# Altium PCB GR_Interface_Emilie.PcbDoc
Units mil, origin at the board's own origin, x right, y up, seen from the top; angles counter-clockwise.
Board outline 3527.56 x 1173.43 mil, 2 copper layers (Top Layer, Bottom Layer); 28 components, 31 nets, 102 pads, 12 vias.
Unrouted connection lines stored in the file: 20.
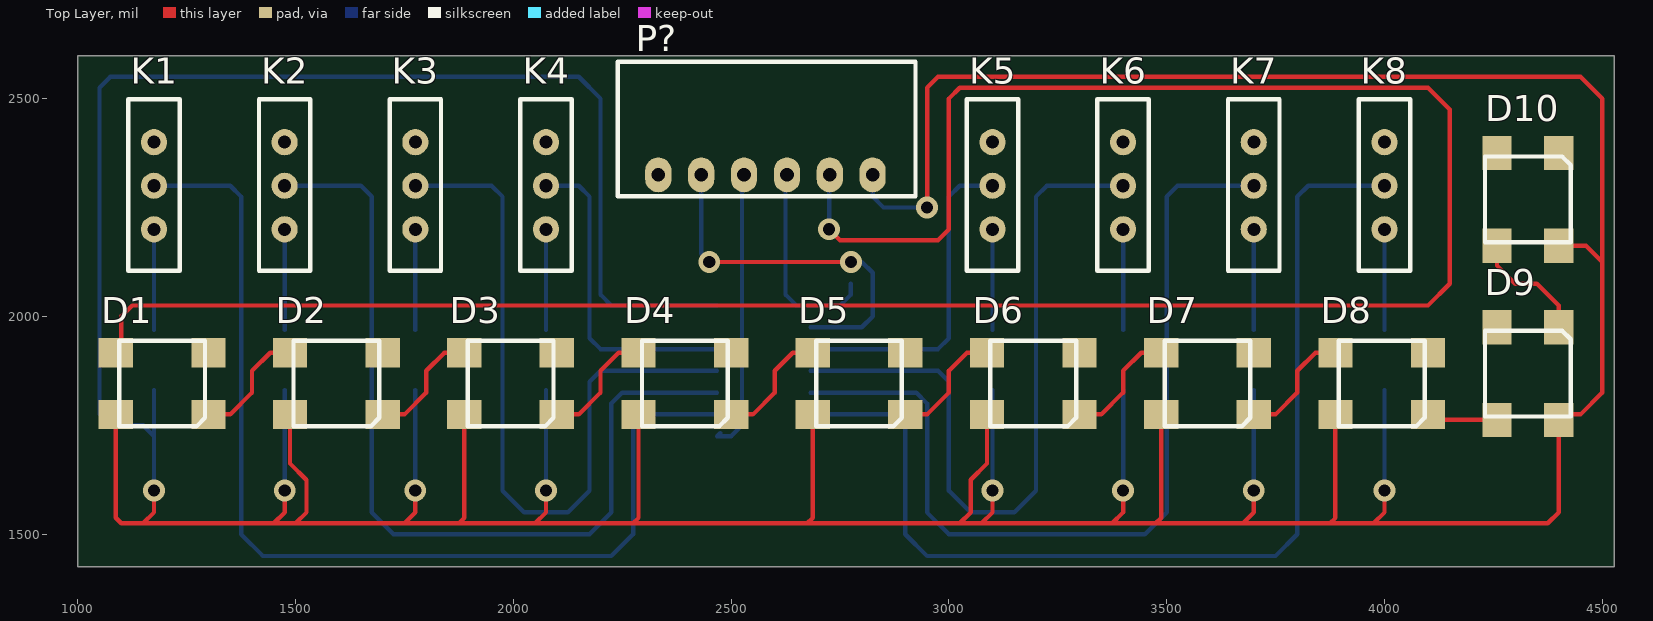
[diagram p0: Top Layer view]
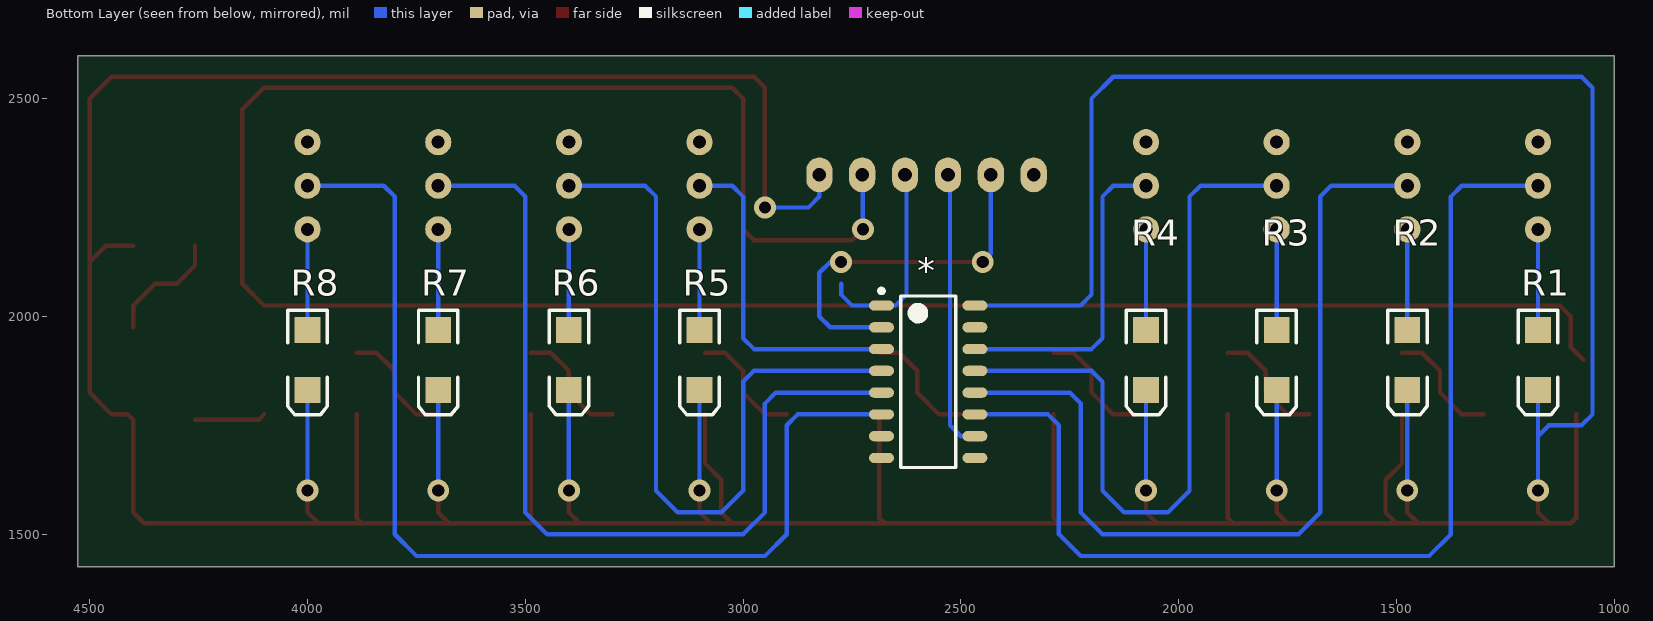
[diagram p1: Bottom Layer view, seen from below]

## Layer stack, top to bottom
Top Solder: solder mask 0.4, Solder Resist, Dk 3.5
Top Layer: signal copper 1.4
Dielectric 1: dielectric 12.6, FR-4, Dk 4.8
Bottom Layer: signal copper 1.4
Bottom Solder: solder mask 0.4, Solder Resist, Dk 3.5

## Board outline
1000,1425 4527.56,1425 4527.56,1811.02 4527.56,2598.43 1000,2598.43

## Design rules (kind name [scope] priority, off if disabled: settings)
Clearance [All] p1: gap=10
PolygonConnect [All] p1: connectstyle=Relief reliefconductorwidth=10 reliefentries=4 polygonreliefangle="90 Angle" airgapwidth=10
RoutingVias [All] p1: holewidth=28 width=50 viastyle="Through Hole" minholewidth=28 minwidth=50 maxholewidth=28 maxwidth=50
SolderMaskExpansion [All] p1: expansion=4
Width [All] p1: maxlimit=10 minlimit=10 preferedwidth=10
30 further rules are at their usual default settings.

## Components (designator, comment, footprint, x,y, rotation, side; value= is the part's Value field where it differs from the comment)
* "74HC165" "16 pins SOIC, TI" 2575,1850 r180 bottom
D1 "NeoPixel" Neopixel 1300,1775 r180 top
D2 "NeoPixel" Neopixel 1700,1775 r180 top
D3 "NeoPixel" Neopixel 2100,1775 r180 top
D4 "NeoPixel" Neopixel 2500,1775 r180 top
D5 "NeoPixel" Neopixel 2900,1775 r180 top
D6 "NeoPixel" Neopixel 3300,1775 r180 top
D7 "NeoPixel" Neopixel 3700,1775 r180 top
D8 "NeoPixel" Neopixel 4100,1775 r180 top
D9 "NeoPixel" Neopixel 4400,1975 r270 top
D10 "NeoPixel" Neopixel 4400,2375 r270 top
K1 "Switch" SWITCH 1175,2400 r270 top
K2 "Switch" SWITCH 1475,2400 r270 top
K3 "Switch" SWITCH 1775,2400 r270 top
K4 "Switch" SWITCH 2075,2400 r270 top
K5 "Switch" SWITCH 3100,2400 r270 top
K6 "Switch" SWITCH 3400,2400 r270 top
K7 "Switch" SWITCH 3700,2400 r270 top
K8 "Switch" SWITCH 4000,2400 r270 top
P? "Header 6H" "MOLEX SPOX 6X1H" 2825,2325 r180 top
R1 "Res2" 3.2X1.6X1.1 1175,1900 r270 bottom
R2 "" 3.2X1.6X1.1 1475,1900 r270 bottom
R3 "Res2" 3.2X1.6X1.1 1775,1900 r270 bottom
R4 "Res2" 3.2X1.6X1.1 2075,1900 r270 bottom
R5 "Res2" 3.2X1.6X1.1 3100,1900 r270 bottom
R6 "Res2" 3.2X1.6X1.1 3400,1900 r270 bottom
R7 "Res2" 3.2X1.6X1.1 3700,1900 r270 bottom
R8 "Res2" 3.2X1.6X1.1 4000,1900 r270 bottom

## Footprints (in the part's own frame and the unit in brackets; to place one, negate y for a bottom-side part, rotate by r counter-clockwise, add the part's x,y. Pads: shape width x height; smd on the part's side, far side on the other; paste and mask are expansions set on the pad)
3.2X1.6X1.1 [mm] "SMT LED; 2 Flat Leads"
  rect 1.5x1.5 smd: 1(-1.75,0) 2(1.75,0)
  silkscreen extent -2.9,-1.15 3.2,1.15
"16 pins SOIC, TI" [mm] "SOIC, 16-Leads, Body 9,90x3,90mm, Pitch 1,27mm, IPC Medium Density"
  oval 1.45x0.6 smd: 1(-2.725,4.445) 2(-2.725,3.175) 3(-2.725,1.905) 4(-2.725,0.635) 5(-2.725,-0.635) 6(-2.725,-1.905) 7(-2.725,-3.175) 8(-2.725,-4.445) 9(2.725,-4.445) 10(2.725,-3.175) 11(2.725,-1.905) 12(2.725,-0.635) 13(2.725,0.635) 14(2.725,1.905) 15(2.725,3.175) 16(2.725,4.445)
  silkscreen extent -2.85,-5 1.6,5.42, body extent -3,-5 3,5, height 1.75
"MOLEX SPOX 6X1H" [mil] "MOLEX SPOX 6X1H, 22-05-7065"
  oval 60x80 hole 31.5: 1(0,0) 2(98.43,0) 3(196.85,0) 4(295.28,0) 5(393.7,0) 6(492.13,0)
  silkscreen extent -98,-260 586,49, body extent -95,-260 590,51, height 193
Neopixel [mm]
  rect 2x1.7 smd: 1(0,0) 2(0,-3.6) 3(5.4,-3.6) 4(5.4,0)
  silkscreen extent 0.2,-4.3 5.2,0.7, body extent 0.19,-4.33 5.19,0.67, height 2
SWITCH [mil] "2 pos switch,  09.03290.01"
  round 60 hole 30: 0(0,0) 1(100,0) 2(200,0)
  silkscreen extent -98,-59 295,59, body extent -98,-59 295,59, height 291

## Part data
*: library part SN74HC165, "8 bits Shift Register"
K1 K2 K3 K4 K5 K6 K7 K8: "3 pos switch, 09.03290.01"
P?: "Header, 6-Pin, Right Angle"
R1 R3 R4 R5 R6 R7 R8: "Resistor"
R2: library part Res2, "Resistor"

## Via types
v1: diameter 50, hole 28, Top Layer to Bottom Layer, 12 vias

## Nets (pads, with @x,y where several pads share a name; then routed paths per layer and width w, separated by ;. In a path a pad name is that pad's centre, name@x,y a point inside that pad or via, vN(x,y) a via of type N, cw(c..) or ccw(c..) an arc to the next point about the centre after c; other vN are vias at no path point)
GND: *.8 *.15 D1.2 D2.2 D3.2 D4.2 D5.2 D6.2 D7.2 D8.2 D9.2 D10.2 K1.0 K2.0 K3.0 K4.0 K5.0 K6.0 K7.0 K8.0 P?.6
Net*_1: *.1 P?.3 | length 470.7
  Bottom Layer w10: P?.3@2625,2325 2625,2050 2650,2025 *.1 2750,2025 2775,2050 2775,2075
Net*_2: *.2 P?.5 | length 846.2
  Top Layer w10: v1(2450,2125) v1(2775,2125)
  Bottom Layer w10: P?.5 2431.3,2143.7 v1(2450,2125) ; *.2 2800,1975 2825,2000 2825,2100 2800,2125 v1(2775,2125)
Net*_3: *.3 K5.1 | length 763.4
  Bottom Layer w10: *.3 2975,1925 3000,1950 3000,2275 3025,2300 K5.1
Net*_4: *.4 K6.1 | length 1704.8
  Bottom Layer w10: *.4 2975,1875 3000,1850 3000,1600 3050,1550 3150,1550 3200,1600 3200,2275 3225,2300 K6.1
Net*_5: *.5 K7.1 | length 2054.8
  Bottom Layer w10: *.5 2925,1825 2950,1800 2950,1550 3000,1500 3450,1500 3500,1550 3500,2275 3525,2300 K7.1
Net*_6: *.6 K8.1 | length 2404.8
  Bottom Layer w10: *.6 2875,1775 2900,1750 2900,1500 2950,1450 3750,1450 3800,1500 3800,2275 3825,2300 K8.1
Net*_10: *.10 P?.4 | length 652.9
  Bottom Layer w10: *.10@2475,1732.28 *.10 2500,1725 2525,1750 P?.4@2525,2325
Net*_11: *.11 K1.1 | length 2379.8
  Bottom Layer w10: K1.1 1350,2300 1375,2275 1375,1500 1425,1450 2225,1450 2275,1500 2275,1750 2300,1775 *.11
Net*_12: *.12 K2.1 | length 2029.8
  Bottom Layer w10: K2.1 1650,2300 1675,2275 1675,1550 1725,1500 2175,1500 2225,1550 2225,1800 2250,1825 *.12
Net*_13: *.13 K3.1 | length 1679.8
  Bottom Layer w10: K3.1 1950,2300 1975,2275 1975,1600 2025,1550 2125,1550 2175,1600 2175,1850 2200,1875 *.13
Net*_14: *.14 K4.1 | length 738.4
  Bottom Layer w10: K4.1 2150,2300 2175,2275 2175,1950 2200,1925 *.14
NetD1_1: D1.1 D2.3 | length 275.4
  Top Layer w10: D1.1 1350,1775 1400,1825 1400,1875 1441.73,1916.73 D2.3
NetD1_3: D1.3 P?.2 | length 5495
  Top Layer w10: D1.3@1070.67,1900 D1.3 1100,1929.33 1100,2000 1125,2025 4100,2025 4150,2075 4150,2475 4100,2525 3025,2525 3000,2500 3000,2200 2975,2175 2750,2175 v1(2725,2200)
  Bottom Layer w10: v1(2725,2200) P?.2@2725,2325
NetD2_1: D2.1 D3.3 | length 275.4
  Top Layer w10: D2.1 1750,1775 1800,1825 1800,1875 1841.73,1916.73 D3.3
NetD3_1: D3.1 D4.3 | length 275.4
  Top Layer w10: D3.1 2150,1775 2200,1825 2200,1875 2241.73,1916.73 D4.3
NetD4_1: D4.1 D5.3 | length 275.4
  Top Layer w10: D4.1 2550,1775 2600,1825 2600,1875 2641.73,1916.73 D5.3
NetD5_1: D5.1 D6.3 | length 275.4
  Top Layer w10: D5.1 2950,1775 3000,1825 3000,1875 3041.73,1916.73 D6.3
NetD6_1: D6.1 D7.3 | length 275.4
  Top Layer w10: D6.1 3350,1775 3400,1825 3400,1875 3441.73,1916.73 D7.3
NetD7_1: D7.1 D8.3 | length 275.4
  Top Layer w10: D7.1 3750,1775 3800,1825 3800,1875 3841.73,1916.73 D8.3
NetD8_1: D8.1 D9.3 | length 163.5
  Top Layer w10: D8.1 4112.6,1762.4 D9.3
NetD9_1: D9.1 D10.3 | length 275.4
  Top Layer w10: D10.3 4258.27,2116.73 4300,2075 4350,2075 4400,2025 D9.1
NetK1_2: K1.2 R1.1 | length 231.1
  Bottom Layer w10: R1.1 K1.2
NetK2_2: K2.2 R2.1 | length 231.1
  Bottom Layer w10: R2.1 K2.2
NetK3_2: K3.2 R3.1 | length 231.1
  Bottom Layer w10: R3.1 K3.2
NetK4_2: K4.2 R4.1 | length 231.1
  Bottom Layer w10: R4.1 K4.2
NetK5_2: K5.2 R5.1 | length 231.1
  Bottom Layer w10: R5.1 K5.2
NetK6_2: K6.2 R6.1 | length 231.1
  Bottom Layer w10: R6.1 K6.2
NetK7_2: K7.2 R7.1 | length 231.1
  Bottom Layer w10: R7.1 K7.2
NetK8_2: K8.2 R8.1 | length 231.1
  Bottom Layer w10: R8.1 K8.2
VCC: *.16 D1.4 D2.4 D3.4 D4.4 D5.4 D6.4 D7.4 D8.4 D9.4 D10.4 P?.1 R1.2 R2.2 R3.2 R4.2 R5.2 R6.2 R7.2 R8.2 | length 13899.9
  Top Layer w10: D1.4 1087.4,1537.6 1100,1525 1150,1525 ; v1(1175,1600) 1175,1550 1150,1525 ; v1(1475,1600) 1475,1550 1450,1525 ; D2.4 1487.4,1662.4 1524.8,1625 1525,1625 1525,1550 1500,1525 ; v1(1775,1600) 1775,1550 1750,1525 ; D3.4 1887.4,1537.4 1875,1525 ; v1(2075,1600) 2075,1550 2050,1525 ; D4.4 2287.4,1537.4 2275,1525 ; D5.4 2687.4,1537.4 2675,1525 ; v1(2950,2250) 2950,2525 2975,2550 4450,2550 4500,2500 4500,1825 4450,1775 4412.6,1775 D9.4 4400,1550 4375,1525 3975,1525 ; D6.4 3087.4,1662.4 3050,1625 3050,1550 3025,1525 ; v1(3100,1600) 3100,1550 3075,1525 ; v1(3400,1600) 3400,1550 3375,1525 ; D7.4 3487.4,1537.4 3475,1525 ; v1(3700,1600) 3700,1550 3675,1525 ; D8.4 3887.4,1537.4 3875,1525 ; v1(4000,1600) 4000,1550 3975,1525 ; D10.4 4462.6,2162.4 4500,2125 ; 1150,1525 1450,1525 ; 1450,1525 1500,1525 ; 1500,1525 1750,1525 ; 1750,1525 1875,1525 ; 1875,1525 2050,1525 ; 2050,1525 2275,1525 ; 2275,1525 2675,1525 ; 2675,1525 3025,1525 ; 3025,1525 3075,1525 ; 3075,1525 3375,1525 ; 3375,1525 3475,1525 ; 3475,1525 3675,1525 ; 3675,1525 3875,1525 ; 3875,1525 3975,1525
  Bottom Layer w10: v1(1175,1600) 1175,1725 ; R1.2 1175,1725 ; v1(1475,1600) R2.2 ; v1(1775,1600) R3.2 ; v1(2075,1600) R4.2 ; *.16 2225,2025 2200,2050 2200,2500 2150,2550 1075,2550 1050,2525 1050,1775 1075,1750 1150,1750 1175,1725 ; P?.1 2825,2275 2850,2250 v1(2950,2250) ; v1(3100,1600) R5.2 ; v1(3400,1600) R6.2 ; v1(3700,1600) R7.2 ; v1(4000,1600) R8.2
pads on no net: *.7 *.9 D10.1